# EAGLE board 2D-CADETIV-RAMPS_v5_v7_eagle (EAGLE 9.6.2)

Size 20 x 128.5 mm. Coordinates in mm from the lower left corner, seen from the top.
Outline: 20,0 0,0 0,128.5 20,128.5 20,0
Outline: circle at 7.5,125.5 radius 1.6
Outline: circle at 10,108 radius 3.16
Outline: circle at 10,51 radius 3.16
Outline: circle at 10,92 radius 3.16
Outline: circle at 10,76 radius 3.16
Outline: circle at 7.5,3 radius 1.6
Outline: circle at 10,36 radius 3.16
Outline: circle at 10,20 radius 3.16
Copper layers (1*16): Top 0.035mm / dielectric 1.5mm / Bottom 0.035mm
Design rules "default": minimum track width 6mil, minimum drill 0.35mm, track to track 6mil, track to pad 6mil, pad to pad 6mil, via to via 6mil, smd to smd 6mil, copper to edge 40mil, drill to drill 6mil, minimum pad ring 10mil, minimum via ring 8mil, stop-mask expansion 4mil, vias tented up to drill 0mil, thermal gap 10mil
Holes 6.32 mm at 10,108 10,92 10,76 10,51 10,36 10,20
Holes 3.2 mm at 7.5,3 7.5,125.5

## Placement (x,y rotation side)
U$1  DPX_LOGOCP  [DPX_LOGO_MED(.8)_CU]  18.67,12.45 0 bottom

## Library data of the parts
U$1 = dpx-graphics

## Text on the board
bNames: panel by | JLCJLCJLCJLC | v7d0-r1 - 7.10.21